# EAGLE board AK9750 Human Pres Panel (EAGLE 7.5.0)
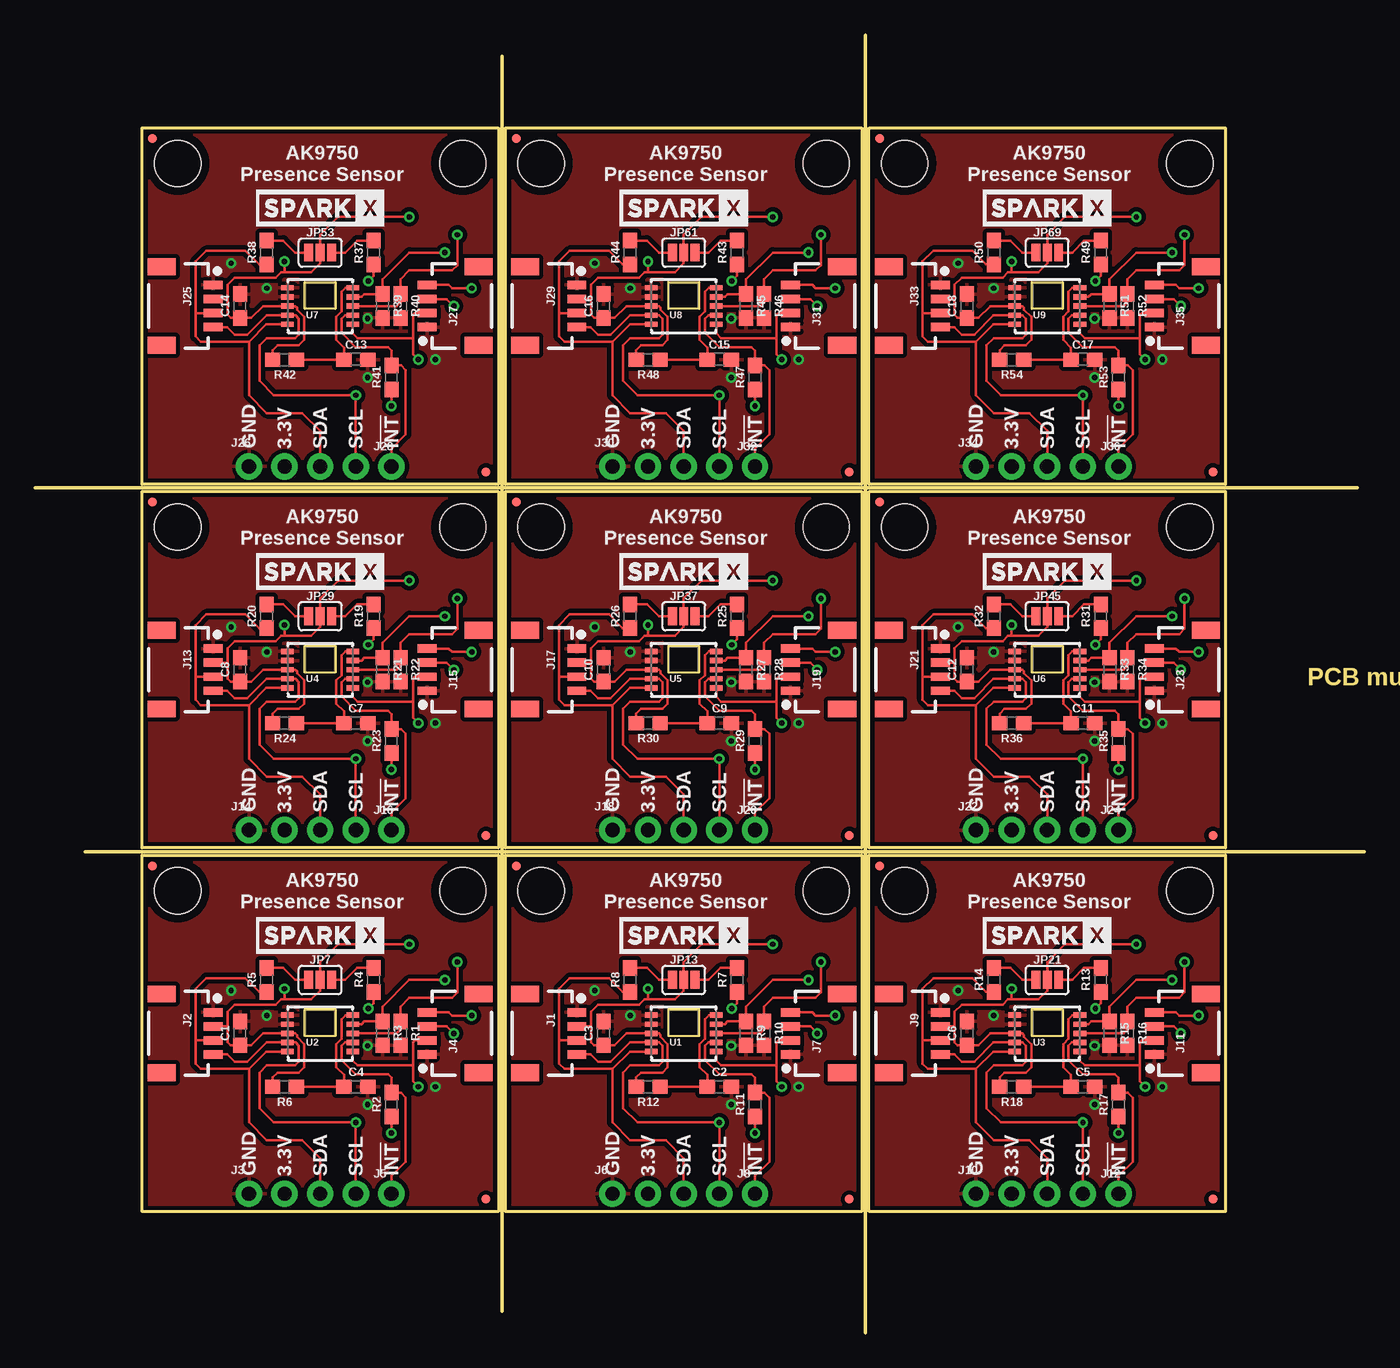
[diagram p0: board, top side]
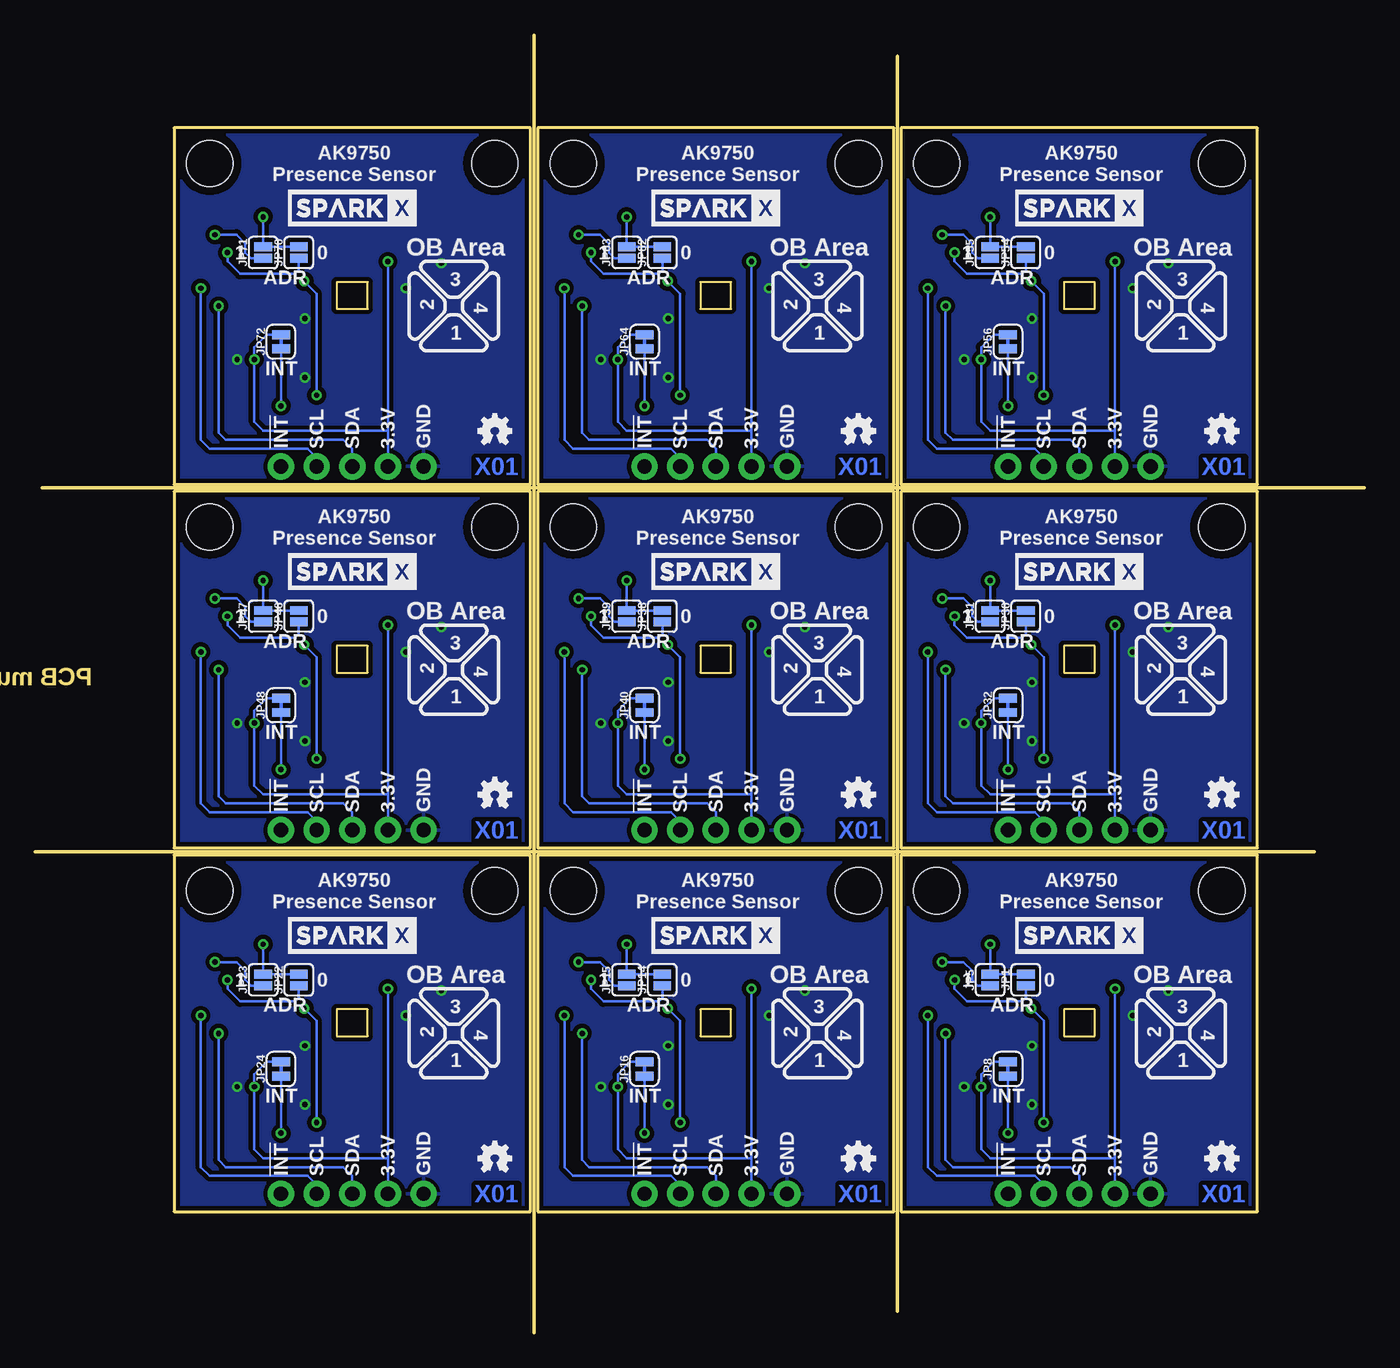
[diagram p1: board, bottom side, seen from below]

Size 94.74 x 92.46 mm. Coordinates in mm from the lower left corner, seen from the top.
Outline: 3.56,34.29 94.74,34.29
Outline: 0,60.2 94.23,60.2
Outline: 59.18,92.46 59.18,0
Outline: 33.27,1.52 33.27,90.93
Outline: 7.62,8.64 7.62,34.04 33.02,34.04 33.02,8.64 7.62,8.64
Outline: 33.53,8.64 33.53,34.04 58.93,34.04 58.93,8.64 33.53,8.64
Outline: 59.44,8.64 59.44,34.04 84.84,34.04 84.84,8.64 59.44,8.64
Outline: 7.62,34.54 7.62,59.94 33.02,59.94 33.02,34.54 7.62,34.54
Outline: 33.53,34.54 33.53,59.94 58.93,59.94 58.93,34.54 33.53,34.54
Outline: 59.44,34.54 59.44,59.94 84.84,59.94 84.84,34.54 59.44,34.54
Outline: 7.62,60.45 7.62,85.85 33.02,85.85 33.02,60.45 7.62,60.45
Outline: 33.53,60.45 33.53,85.85 58.93,85.85 58.93,60.45 33.53,60.45
Outline: 59.44,60.45 59.44,85.85 84.84,85.85 84.84,60.45 59.44,60.45
Copper layers (1*16): Top 0.035mm / dielectric 1.5mm / Bottom 0.035mm
Design rules "SparkFun-2-layer-TIGHT": minimum track width 7mil, minimum drill 15mil, track to track 7mil, track to pad 7mil, pad to pad 7mil, via to via 7mil, smd to smd 7mil, copper to edge 7mil, drill to drill 7mil, minimum pad ring 7mil, minimum via ring 7mil, stop-mask expansion 4mil, vias tented up to drill 25mil, thermal gap 10mil

## Footprints (pad centres in the part's own frame; a part is rotated, then mirrored left to right if it is on the bottom)
0603 = smd 1.1 x 1: 1 -0.85,0; 2 0.85,0
1X04_1MM_RA = smd 0.6 x 1.35: 1 -1.5,0; 2 -0.5,0; 3 0.5,0; 4 1.5,0 | smd 1.2 x 2: NC1 2.8,-3.675; NC2 -2.8,-3.675
1X04_NO_SILK = drill 1.016 pad 1.88: 1 0,0; 2 2.54,0; 3 5.08,0; 4 7.62,0
1X01NS_KIT = drill 1.016 pad 1.88: 1 0,0
SMT-JUMPER_2_NO_SILK = smd 0.635 x 1.27: 1 -0.406,0; 2 0.406,0
MICRO-FIDUCIAL = smd 0.635 x 0.635: 1 0,0
STAND-OFF = hole 3.302: 0,0
SMT-JUMPER_3_2-NC_PASTE_SILK = smd 0.635 x 1.27: 1 -0.813,0; 2 0,0; 3 0.813,0
SMT-JUMPER_2_NC_TRACE_SILK = smd 0.635 x 1.27: 1 -0.508,0; 2 0.508,0
SON10 = smd 0.9 x 0.38: 1 2.325,1.3; 2 2.325,0.65; 3 2.325,0; 4 2.325,-0.65; 5 2.325,-1.3; 6 -2.325,-1.3; 7 -2.325,-0.65; 8 -2.325,0; 9 -2.325,0.65; 10 -2.325,1.3

## Placement (x,y rotation side)
C1  1.0uF  [0603]  14.61,21.34 90 top
C2  1.0uF  [0603]  48.77,17.53 0 top
C3  1.0uF  [0603]  40.51,21.34 90 top
C4  1.0uF  [0603]  22.86,17.53 0 top
C5  1.0uF  [0603]  74.68,17.53 0 top
C6  1.0uF  [0603]  66.42,21.34 90 top
C7  1.0uF  [0603]  22.86,43.43 0 top
C8  1.0uF  [0603]  14.61,47.24 90 top
C9  1.0uF  [0603]  48.77,43.43 0 top
C10  1.0uF  [0603]  40.51,47.24 90 top
C11  1.0uF  [0603]  74.68,43.43 0 top
C12  1.0uF  [0603]  66.42,47.24 90 top
C13  1.0uF  [0603]  22.86,69.34 0 top
C14  1.0uF  [0603]  14.61,73.15 90 top
C15  1.0uF  [0603]  48.77,69.34 0 top
C16  1.0uF  [0603]  40.51,73.15 90 top
C17  1.0uF  [0603]  74.68,69.34 0 top
C18  1.0uF  [0603]  66.42,73.15 90 top
J1  SMD  [1X04_1MM_RA]  38.61,21.34 270 top
J2  SMD  [1X04_1MM_RA]  12.7,21.34 270 top
J3  PTH  [1X04_NO_SILK]  15.24,9.91 0 top
J4  SMD  [1X04_1MM_RA]  27.94,21.34 90 top
J5  [1X01NS_KIT]  25.4,9.91 0 top
J6  PTH  [1X04_NO_SILK]  41.15,9.91 0 top
J7  SMD  [1X04_1MM_RA]  53.85,21.34 90 top
J8  [1X01NS_KIT]  51.31,9.91 0 top
J9  SMD  [1X04_1MM_RA]  64.52,21.34 270 top
J10  PTH  [1X04_NO_SILK]  67.06,9.91 0 top
J11  SMD  [1X04_1MM_RA]  79.76,21.34 90 top
J12  [1X01NS_KIT]  77.22,9.91 0 top
J13  SMD  [1X04_1MM_RA]  12.7,47.24 270 top
J14  PTH  [1X04_NO_SILK]  15.24,35.81 0 top
J15  SMD  [1X04_1MM_RA]  27.94,47.24 90 top
J16  [1X01NS_KIT]  25.4,35.81 0 top
J17  SMD  [1X04_1MM_RA]  38.61,47.24 270 top
J18  PTH  [1X04_NO_SILK]  41.15,35.81 0 top
J19  SMD  [1X04_1MM_RA]  53.85,47.24 90 top
J20  [1X01NS_KIT]  51.31,35.81 0 top
J21  SMD  [1X04_1MM_RA]  64.52,47.24 270 top
J22  PTH  [1X04_NO_SILK]  67.06,35.81 0 top
J23  SMD  [1X04_1MM_RA]  79.76,47.24 90 top
J24  [1X01NS_KIT]  77.22,35.81 0 top
J25  SMD  [1X04_1MM_RA]  12.7,73.15 270 top
J26  PTH  [1X04_NO_SILK]  15.24,61.72 0 top
J27  SMD  [1X04_1MM_RA]  27.94,73.15 90 top
J28  [1X01NS_KIT]  25.4,61.72 0 top
J29  SMD  [1X04_1MM_RA]  38.61,73.15 270 top
J30  PTH  [1X04_NO_SILK]  41.15,61.72 0 top
J31  SMD  [1X04_1MM_RA]  53.85,73.15 90 top
J32  [1X01NS_KIT]  51.31,61.72 0 top
J33  SMD  [1X04_1MM_RA]  64.52,73.15 270 top
J34  PTH  [1X04_NO_SILK]  67.06,61.72 0 top
J35  SMD  [1X04_1MM_RA]  79.76,73.15 90 top
J36  [1X01NS_KIT]  77.22,61.72 0 top
JP1  [SMT-JUMPER_2_NO_SILK]  24.13,25.15 90 bottom
JP2  FIDUCIALUFIDUCIAL  [MICRO-FIDUCIAL]  32.13,9.52 0 top
JP3  STAND-OFF  [STAND-OFF]  10.16,31.5 0 top
JP4  STAND-OFF  [STAND-OFF]  30.48,31.5 0 top
JP5  [SMT-JUMPER_2_NO_SILK]  26.67,25.15 90 bottom
JP6  FIDUCIALUFIDUCIAL  [MICRO-FIDUCIAL]  8.38,33.27 0 top
JP7  [SMT-JUMPER_3_2-NC_PASTE_SILK]  20.32,25.15 0 top
JP8  [SMT-JUMPER_2_NC_TRACE_SILK]  25.4,18.8 90 bottom
JP9  STAND-OFF  [STAND-OFF]  36.07,31.5 0 top
JP10  STAND-OFF  [STAND-OFF]  56.39,31.5 0 top
JP11  FIDUCIALUFIDUCIAL  [MICRO-FIDUCIAL]  58.04,9.52 0 top
JP12  FIDUCIALUFIDUCIAL  [MICRO-FIDUCIAL]  34.29,33.27 0 top
JP13  [SMT-JUMPER_3_2-NC_PASTE_SILK]  46.23,25.15 0 top
JP14  [SMT-JUMPER_2_NO_SILK]  50.04,25.15 90 bottom
JP15  [SMT-JUMPER_2_NO_SILK]  52.58,25.15 90 bottom
JP16  [SMT-JUMPER_2_NC_TRACE_SILK]  51.31,18.8 90 bottom
JP17  STAND-OFF  [STAND-OFF]  61.98,31.5 0 top
JP18  STAND-OFF  [STAND-OFF]  82.3,31.5 0 top
JP19  FIDUCIALUFIDUCIAL  [MICRO-FIDUCIAL]  83.95,9.52 0 top
JP20  FIDUCIALUFIDUCIAL  [MICRO-FIDUCIAL]  60.2,33.27 0 top
JP21  [SMT-JUMPER_3_2-NC_PASTE_SILK]  72.14,25.15 0 top
JP22  [SMT-JUMPER_2_NO_SILK]  75.95,25.15 90 bottom
JP23  [SMT-JUMPER_2_NO_SILK]  78.49,25.15 90 bottom
JP24  [SMT-JUMPER_2_NC_TRACE_SILK]  77.22,18.8 90 bottom
JP25  STAND-OFF  [STAND-OFF]  10.16,57.4 0 top
JP26  STAND-OFF  [STAND-OFF]  30.48,57.4 0 top
JP27  FIDUCIALUFIDUCIAL  [MICRO-FIDUCIAL]  32.13,35.43 0 top
JP28  FIDUCIALUFIDUCIAL  [MICRO-FIDUCIAL]  8.38,59.18 0 top
JP29  [SMT-JUMPER_3_2-NC_PASTE_SILK]  20.32,51.05 0 top
JP30  [SMT-JUMPER_2_NO_SILK]  24.13,51.05 90 bottom
JP31  [SMT-JUMPER_2_NO_SILK]  26.67,51.05 90 bottom
JP32  [SMT-JUMPER_2_NC_TRACE_SILK]  25.4,44.7 90 bottom
JP33  STAND-OFF  [STAND-OFF]  36.07,57.4 0 top
JP34  STAND-OFF  [STAND-OFF]  56.39,57.4 0 top
JP35  FIDUCIALUFIDUCIAL  [MICRO-FIDUCIAL]  58.04,35.43 0 top
JP36  FIDUCIALUFIDUCIAL  [MICRO-FIDUCIAL]  34.29,59.18 0 top
JP37  [SMT-JUMPER_3_2-NC_PASTE_SILK]  46.23,51.05 0 top
JP38  [SMT-JUMPER_2_NO_SILK]  50.04,51.05 90 bottom
JP39  [SMT-JUMPER_2_NO_SILK]  52.58,51.05 90 bottom
JP40  [SMT-JUMPER_2_NC_TRACE_SILK]  51.31,44.7 90 bottom
JP41  STAND-OFF  [STAND-OFF]  61.98,57.4 0 top
JP42  STAND-OFF  [STAND-OFF]  82.3,57.4 0 top
JP43  FIDUCIALUFIDUCIAL  [MICRO-FIDUCIAL]  83.95,35.43 0 top
JP44  FIDUCIALUFIDUCIAL  [MICRO-FIDUCIAL]  60.2,59.18 0 top
JP45  [SMT-JUMPER_3_2-NC_PASTE_SILK]  72.14,51.05 0 top
JP46  [SMT-JUMPER_2_NO_SILK]  75.95,51.05 90 bottom
JP47  [SMT-JUMPER_2_NO_SILK]  78.49,51.05 90 bottom
JP48  [SMT-JUMPER_2_NC_TRACE_SILK]  77.22,44.7 90 bottom
JP49  STAND-OFF  [STAND-OFF]  10.16,83.31 0 top
JP50  STAND-OFF  [STAND-OFF]  30.48,83.31 0 top
JP51  FIDUCIALUFIDUCIAL  [MICRO-FIDUCIAL]  32.13,61.34 0 top
JP52  FIDUCIALUFIDUCIAL  [MICRO-FIDUCIAL]  8.38,85.09 0 top
JP53  [SMT-JUMPER_3_2-NC_PASTE_SILK]  20.32,76.96 0 top
JP54  [SMT-JUMPER_2_NO_SILK]  24.13,76.96 90 bottom
JP55  [SMT-JUMPER_2_NO_SILK]  26.67,76.96 90 bottom
JP56  [SMT-JUMPER_2_NC_TRACE_SILK]  25.4,70.61 90 bottom
JP57  STAND-OFF  [STAND-OFF]  36.07,83.31 0 top
JP58  STAND-OFF  [STAND-OFF]  56.39,83.31 0 top
JP59  FIDUCIALUFIDUCIAL  [MICRO-FIDUCIAL]  58.04,61.34 0 top
JP60  FIDUCIALUFIDUCIAL  [MICRO-FIDUCIAL]  34.29,85.09 0 top
JP61  [SMT-JUMPER_3_2-NC_PASTE_SILK]  46.23,76.96 0 top
JP62  [SMT-JUMPER_2_NO_SILK]  50.04,76.96 90 bottom
JP63  [SMT-JUMPER_2_NO_SILK]  52.58,76.96 90 bottom
JP64  [SMT-JUMPER_2_NC_TRACE_SILK]  51.31,70.61 90 bottom
JP65  STAND-OFF  [STAND-OFF]  61.98,83.31 0 top
JP66  STAND-OFF  [STAND-OFF]  82.3,83.31 0 top
JP67  FIDUCIALUFIDUCIAL  [MICRO-FIDUCIAL]  83.95,61.34 0 top
JP68  FIDUCIALUFIDUCIAL  [MICRO-FIDUCIAL]  60.2,85.09 0 top
JP69  [SMT-JUMPER_3_2-NC_PASTE_SILK]  72.14,76.96 0 top
JP70  [SMT-JUMPER_2_NO_SILK]  75.95,76.96 90 bottom
JP71  [SMT-JUMPER_2_NO_SILK]  78.49,76.96 90 bottom
JP72  [SMT-JUMPER_2_NC_TRACE_SILK]  77.22,70.61 90 bottom
LOGO1  OSHW-LOGOMINI  [OSHW-LOGO-MINI]  10.16,12.45 0 bottom
LOGO2  OSHW-LOGOMINI  [OSHW-LOGO-MINI]  36.07,12.45 0 bottom
LOGO3  OSHW-LOGOMINI  [OSHW-LOGO-MINI]  61.98,12.45 0 bottom
LOGO4  OSHW-LOGOMINI  [OSHW-LOGO-MINI]  10.16,38.35 0 bottom
LOGO5  OSHW-LOGOMINI  [OSHW-LOGO-MINI]  36.07,38.35 0 bottom
LOGO6  OSHW-LOGOMINI  [OSHW-LOGO-MINI]  61.98,38.35 0 bottom
LOGO7  OSHW-LOGOMINI  [OSHW-LOGO-MINI]  10.16,64.26 0 bottom
LOGO8  OSHW-LOGOMINI  [OSHW-LOGO-MINI]  36.07,64.26 0 bottom
LOGO9  OSHW-LOGOMINI  [OSHW-LOGO-MINI]  61.98,64.26 0 bottom
R1  10k  [0603]  26.04,21.34 270 top
R2  10k  [0603]  25.4,16.26 90 top
R3  10k  [0603]  24.77,21.34 270 top
R4  4.7k  [0603]  24.13,25.15 90 top
R5  4.7k  [0603]  16.51,25.15 90 top
R6  330  [0603]  17.78,17.53 180 top
R7  4.7k  [0603]  50.04,25.15 90 top
R8  4.7k  [0603]  42.42,25.15 90 top
R9  10k  [0603]  50.67,21.34 270 top
R10  10k  [0603]  51.94,21.34 270 top
R11  10k  [0603]  51.31,16.26 90 top
R12  330  [0603]  43.69,17.53 180 top
R13  4.7k  [0603]  75.95,25.15 90 top
R14  4.7k  [0603]  68.33,25.15 90 top
R15  10k  [0603]  76.58,21.34 270 top
R16  10k  [0603]  77.85,21.34 270 top
R17  10k  [0603]  77.22,16.26 90 top
R18  330  [0603]  69.6,17.53 180 top
R19  4.7k  [0603]  24.13,51.05 90 top
R20  4.7k  [0603]  16.51,51.05 90 top
R21  10k  [0603]  24.77,47.24 270 top
R22  10k  [0603]  26.04,47.24 270 top
R23  10k  [0603]  25.4,42.16 90 top
R24  330  [0603]  17.78,43.43 180 top
R25  4.7k  [0603]  50.04,51.05 90 top
R26  4.7k  [0603]  42.42,51.05 90 top
R27  10k  [0603]  50.67,47.24 270 top
R28  10k  [0603]  51.94,47.24 270 top
R29  10k  [0603]  51.31,42.16 90 top
R30  330  [0603]  43.69,43.43 180 top
R31  4.7k  [0603]  75.95,51.05 90 top
R32  4.7k  [0603]  68.33,51.05 90 top
R33  10k  [0603]  76.58,47.24 270 top
R34  10k  [0603]  77.85,47.24 270 top
R35  10k  [0603]  77.22,42.16 90 top
R36  330  [0603]  69.6,43.43 180 top
R37  4.7k  [0603]  24.13,76.96 90 top
R38  4.7k  [0603]  16.51,76.96 90 top
R39  10k  [0603]  24.77,73.15 270 top
R40  10k  [0603]  26.04,73.15 270 top
R41  10k  [0603]  25.4,68.07 90 top
R42  330  [0603]  17.78,69.34 180 top
R43  4.7k  [0603]  50.04,76.96 90 top
R44  4.7k  [0603]  42.42,76.96 90 top
R45  10k  [0603]  50.67,73.15 270 top
R46  10k  [0603]  51.94,73.15 270 top
R47  10k  [0603]  51.31,68.07 90 top
R48  330  [0603]  43.69,69.34 180 top
R49  4.7k  [0603]  75.95,76.96 90 top
R50  4.7k  [0603]  68.33,76.96 90 top
R51  10k  [0603]  76.58,73.15 270 top
R52  10k  [0603]  77.85,73.15 270 top
R53  10k  [0603]  77.22,68.07 90 top
R54  330  [0603]  69.6,69.34 180 top
U1  AK9750  [SON10]  46.23,21.34 0 top
U2  AK9750  [SON10]  20.32,21.34 0 top
U3  AK9750  [SON10]  72.14,21.34 0 top
U4  AK9750  [SON10]  20.32,47.24 0 top
U5  AK9750  [SON10]  46.23,47.24 0 top
U6  AK9750  [SON10]  72.14,47.24 0 top
U7  AK9750  [SON10]  20.32,73.15 0 top
U8  AK9750  [SON10]  46.23,73.15 0 top
U9  AK9750  [SON10]  72.14,73.15 0 top
U$1  SPARKX-LOGO4  [SPARKX-MEDIUM]  20.32,28.32 0 bottom
U$2  SPARKX-LOGO4  [SPARKX-MEDIUM]  20.32,28.32 0 top
U$3  SPARKX-LOGO4  [SPARKX-MEDIUM]  46.23,28.32 0 top
U$4  SPARKX-LOGO4  [SPARKX-MEDIUM]  46.23,28.32 0 bottom
U$5  SPARKX-LOGO4  [SPARKX-MEDIUM]  72.14,28.32 0 top
U$6  SPARKX-LOGO4  [SPARKX-MEDIUM]  72.14,28.32 0 bottom
U$7  SPARKX-LOGO4  [SPARKX-MEDIUM]  20.32,54.23 0 top
U$8  SPARKX-LOGO4  [SPARKX-MEDIUM]  20.32,54.23 0 bottom
U$9  SPARKX-LOGO4  [SPARKX-MEDIUM]  46.23,54.23 0 top
U$10  SPARKX-LOGO4  [SPARKX-MEDIUM]  46.23,54.23 0 bottom
U$11  SPARKX-LOGO4  [SPARKX-MEDIUM]  72.14,54.23 0 top
U$12  SPARKX-LOGO4  [SPARKX-MEDIUM]  72.14,54.23 0 bottom
U$13  SPARKX-LOGO4  [SPARKX-MEDIUM]  20.32,80.14 0 top
U$14  SPARKX-LOGO4  [SPARKX-MEDIUM]  20.32,80.14 0 bottom
U$15  SPARKX-LOGO4  [SPARKX-MEDIUM]  46.23,80.14 0 top
U$16  SPARKX-LOGO4  [SPARKX-MEDIUM]  46.23,80.14 0 bottom
U$17  SPARKX-LOGO4  [SPARKX-MEDIUM]  72.14,80.14 0 top
U$18  SPARKX-LOGO4  [SPARKX-MEDIUM]  72.14,80.14 0 bottom

## Library data of the parts
C1-C18 = SparkFun-Capacitors; PROD_ID: CAP-00868
J1-J4 J6 J7 J9-J11 J13-J15 J17-J19 J21-J23 J25-J27 J29-J31 J33-J35 U1-U9 U$1-U$18 = SparkX
J5 J8 J12 J16 J20 J24 J28 J32 J36 = SparkFun-Connectors
JP1 JP5 JP7 JP8 JP13-JP16 JP21-JP24 JP29-JP32 JP37-JP40 JP45-JP48 JP53-JP56 JP61-JP64 JP69-JP72 = SparkFun-Jumpers
JP2-JP4 JP6 JP9-JP12 JP17-JP20 JP25-JP28 JP33-JP36 JP41-JP44 JP49-JP52 JP57-JP60 JP65-JP68 = SparkFun
LOGO1-LOGO9 = SparkFun-Aesthetics
R1-R3 R9-R11 R15-R17 R21-R23 R27-R29 R33-R35 R39-R41 R45-R47 R51-R53 = SparkFun-Resistors; PROD_ID: RES-00824
R4 R5 R7 R8 R13 R14 R19 R20 R25 R26 R31 R32 R37 R38 R43 R44 R49 R50 = SparkFun-Resistors; PROD_ID: RES-07857
R6 R12 R18 R24 R30 R36 R42 R48 R54 = SparkFun-Resistors; PROD_ID: RES-00818

## Nets
3.3V: C1.1 J2.2 J3.2 J4.2 JP1.2 JP5.2 JP7.2 JP8.2 R6.2 U2.5 U2.8
3.3V1: C3.1 J1.2 J6.2 J7.2 JP13.2 JP14.2 JP15.2 JP16.2 R12.2 U1.5 U1.8
3.3V2: C6.1 J9.2 J10.2 J11.2 JP21.2 JP22.2 JP23.2 JP24.2 R18.2 U3.5 U3.8
3.3V3: C8.1 J13.2 J14.2 J15.2 JP29.2 JP30.2 JP31.2 JP32.2 R24.2 U4.5 U4.8
3.3V4: C10.1 J17.2 J18.2 J19.2 JP37.2 JP38.2 JP39.2 JP40.2 R30.2 U5.5 U5.8
3.3V5: C12.1 J21.2 J22.2 J23.2 JP45.2 JP46.2 JP47.2 JP48.2 R36.2 U6.5 U6.8
3.3V6: C14.1 J25.2 J26.2 J27.2 JP53.2 JP54.2 JP55.2 JP56.2 R42.2 U7.5 U7.8
3.3V7: C16.1 J29.2 J30.2 J31.2 JP61.2 JP62.2 JP63.2 JP64.2 R48.2 U8.5 U8.8
3.3V8: C18.1 J33.2 J34.2 J35.2 JP69.2 JP70.2 JP71.2 JP72.2 R54.2 U9.5 U9.8
!INT: J5.1 R2.2 U2.4
!INT1: J8.1 R11.2 U1.4
!INT2: J12.1 R17.2 U3.4
!INT3: J16.1 R23.2 U4.4
!INT4: J20.1 R29.2 U5.4
!INT5: J24.1 R35.2 U6.4
!INT6: J28.1 R41.2 U7.4
!INT7: J32.1 R47.2 U8.4
!INT8: J36.1 R53.2 U9.4
ADR0: JP1.1 R3.1 U2.2
ADR1: JP5.1 R1.1 U2.3
ADR2: JP14.1 R9.1 U1.2
ADR3: JP15.1 R10.1 U1.3
ADR4: JP22.1 R15.1 U3.2
ADR5: JP23.1 R16.1 U3.3
ADR6: JP30.1 R21.1 U4.2
ADR7: JP31.1 R22.1 U4.3
ADR8: JP38.1 R27.1 U5.2
ADR9: JP39.1 R28.1 U5.3
ADR10: JP46.1 R33.1 U6.2
ADR11: JP47.1 R34.1 U6.3
ADR12: JP54.1 R39.1 U7.2
ADR13: JP55.1 R40.1 U7.3
ADR14: JP62.1 R45.1 U8.2
ADR15: JP63.1 R46.1 U8.3
ADR16: JP70.1 R51.1 U9.2
ADR17: JP71.1 R52.1 U9.3
GND: C1.2 C4.2 J2.1 J3.1 J4.1 R1.2 R3.2 U2.9 U2.10
GND1: C2.2 C3.2 J1.1 J6.1 J7.1 R9.2 R10.2 U1.9 U1.10
GND2: C5.2 C6.2 J9.1 J10.1 J11.1 R15.2 R16.2 U3.9 U3.10
GND3: C7.2 C8.2 J13.1 J14.1 J15.1 R21.2 R22.2 U4.9 U4.10
GND4: C9.2 C10.2 J17.1 J18.1 J19.1 R27.2 R28.2 U5.9 U5.10
GND5: C11.2 C12.2 J21.1 J22.1 J23.1 R33.2 R34.2 U6.9 U6.10
GND6: C13.2 C14.2 J25.1 J26.1 J27.1 R39.2 R40.2 U7.9 U7.10
GND7: C15.2 C16.2 J29.1 J30.1 J31.1 R45.2 R46.2 U8.9 U8.10
GND8: C17.2 C18.2 J33.1 J34.1 J35.1 R51.2 R52.2 U9.9 U9.10
N$1: JP7.1 R5.2
N$2: JP7.3 R4.2
N$3: JP8.1 R2.1
N$4: C4.1 R6.1 U2.1
N$5: JP13.1 R8.2
N$6: JP13.3 R7.2
N$7: JP16.1 R11.1
N$8: C2.1 R12.1 U1.1
N$9: JP21.1 R14.2
N$10: JP21.3 R13.2
N$11: JP24.1 R17.1
N$12: C5.1 R18.1 U3.1
N$13: JP29.1 R20.2
N$14: JP29.3 R19.2
N$15: JP32.1 R23.1
N$16: C7.1 R24.1 U4.1
N$17: JP37.1 R26.2
N$18: JP37.3 R25.2
N$19: JP40.1 R29.1
N$20: C9.1 R30.1 U5.1
N$21: JP45.1 R32.2
N$22: JP45.3 R31.2
N$23: JP48.1 R35.1
N$24: C11.1 R36.1 U6.1
N$25: JP53.1 R38.2
N$26: JP53.3 R37.2
N$27: JP56.1 R41.1
N$28: C13.1 R42.1 U7.1
N$29: JP61.1 R44.2
N$30: JP61.3 R43.2
N$31: JP64.1 R47.1
N$32: C15.1 R48.1 U8.1
N$33: JP69.1 R50.2
N$34: JP69.3 R49.2
N$35: JP72.1 R53.1
N$36: C17.1 R54.1 U9.1
SCL: J2.4 J3.4 J4.4 R4.1 U2.7
SCL1: J1.4 J6.4 J7.4 R7.1 U1.7
SCL2: J9.4 J10.4 J11.4 R13.1 U3.7
SCL3: J13.4 J14.4 J15.4 R19.1 U4.7
SCL4: J17.4 J18.4 J19.4 R25.1 U5.7
SCL5: J21.4 J22.4 J23.4 R31.1 U6.7
SCL6: J25.4 J26.4 J27.4 R37.1 U7.7
SCL7: J29.4 J30.4 J31.4 R43.1 U8.7
SCL8: J33.4 J34.4 J35.4 R49.1 U9.7
SDA: J2.3 J3.3 J4.3 R5.1 U2.6
SDA1: J1.3 J6.3 J7.3 R8.1 U1.6
SDA2: J9.3 J10.3 J11.3 R14.1 U3.6
SDA3: J13.3 J14.3 J15.3 R20.1 U4.6
SDA4: J17.3 J18.3 J19.3 R26.1 U5.6
SDA5: J21.3 J22.3 J23.3 R32.1 U6.6
SDA6: J25.3 J26.3 J27.3 R38.1 U7.6
SDA7: J29.3 J30.3 J31.3 R44.1 U8.6
SDA8: J33.3 J34.3 J35.3 R50.1 U9.6

## Tracks (layer width: path | path; a pad name or v marks a point on that pad's centre or on a via)
3.3V  (via drill 0.38)
  Top 0.178: U2.5 22.64,19.39 22.99,19.05 26.92,19.05 | 17.78,23.75 17.53,23.75 17.14,23.37 14.22,23.37 13.72,22.86 13.72,21.84 | J2.2 13.71,21.84 13.72,21.84 | v26.67,27.69 21.59,27.69 20.32,26.42 JP7.2 20.32,24.38 19.68,23.75 17.78,23.75 | v17.78,24.51 17.78,23.75 | 13.72,21.84 13.72,20.7 13.93,20.49 C1.1 15.41,20.49 16.26,21.34 U2.8 18.54,21.34 18.67,21.21 18.67,21.08 19.18,20.57 19.18,18.92 18.8,18.54 17.27,18.54 16.93,18.2 R6.2 | 26.92,19.05 26.92,17.91 v27.3,17.53 | J4.2 27.06,20.84 26.92,20.7 26.92,19.05
  Bottom 0.178: JP1.2 JP5.2 v26.67,27.69 | J3.2 17.78,12.45 | 17.78,12.45 v17.78,24.51 | 17.78,12.45 26.67,12.45 27.3,13.08 v27.3,17.53 27.3,18.41 26.42,19.3 JP8.2
3.3V1  (via drill 0.38)
  Top 0.178: U1.5 48.55,19.39 48.89,19.05 52.83,19.05 | 43.69,23.75 43.43,23.75 43.05,23.37 40.13,23.37 39.62,22.86 39.62,21.84 | J1.2 39.62,21.84 | v52.58,27.69 47.5,27.69 46.23,26.42 JP13.2 46.23,24.38 45.59,23.75 43.69,23.75 | v43.69,24.51 43.69,23.75 | 39.62,21.84 39.62,20.7 39.84,20.49 C3.1 41.31,20.49 42.16,21.34 U1.8 44.45,21.34 44.58,21.21 44.58,21.08 45.09,20.57 45.09,18.92 44.7,18.54 43.18,18.54 42.84,18.2 R12.2 | 52.83,19.05 52.83,17.91 v53.21,17.53 | J7.2 52.97,20.84 52.83,20.7 52.83,19.05
  Bottom 0.178: JP14.2 JP15.2 v52.58,27.69 | J6.2 43.69,12.45 | 43.69,12.45 v43.69,24.51 | 43.69,12.45 52.58,12.45 53.21,13.08 v53.21,17.53 53.21,18.41 52.32,19.3 JP16.2
3.3V2  (via drill 0.38)
  Top 0.178: U3.5 74.46,19.39 74.8,19.05 78.74,19.05 | 69.6,23.75 69.34,23.75 68.96,23.37 66.04,23.37 65.53,22.86 65.53,21.84 | J9.2 65.52,21.84 65.53,21.84 | v78.49,27.69 73.41,27.69 72.14,26.42 JP21.2 72.14,24.38 71.5,23.75 69.6,23.75 | v69.6,24.51 69.6,23.75 | 65.53,21.84 65.53,20.7 65.75,20.49 C6.1 67.22,20.49 68.07,21.34 U3.8 70.36,21.34 70.48,21.21 70.48,21.08 70.99,20.57 70.99,18.92 70.61,18.54 69.09,18.54 68.75,18.2 R18.2 | 78.74,19.05 78.74,17.91 v79.12,17.53 | J11.2 78.88,20.84 78.74,20.7 78.74,19.05
  Bottom 0.178: JP22.2 JP23.2 v78.49,27.69 | J10.2 69.6,12.45 | 69.6,12.45 v69.6,24.51 | 69.6,12.45 78.49,12.45 79.12,13.08 v79.12,17.53 79.12,18.41 78.23,19.3 JP24.2
3.3V3  (via drill 0.38)
  Top 0.178: U4.5 22.64,45.3 22.99,44.96 26.92,44.96 | 17.78,49.66 17.53,49.66 17.14,49.28 14.22,49.28 13.72,48.77 13.72,47.75 | J13.2 13.71,47.74 13.72,47.75 | v26.67,53.59 21.59,53.59 20.32,52.32 JP29.2 20.32,50.29 19.68,49.66 17.78,49.66 | v17.78,50.42 17.78,49.66 | 13.72,47.75 13.72,46.61 13.93,46.39 C8.1 15.41,46.39 16.26,47.24 U4.8 18.54,47.24 18.67,47.12 18.67,46.99 19.18,46.48 19.18,44.83 18.8,44.45 17.27,44.45 16.93,44.11 R24.2 | 26.92,44.96 26.92,43.81 v27.3,43.43 | J15.2 27.06,46.74 26.92,46.61 26.92,44.96
  Bottom 0.178: JP30.2 JP31.2 v26.67,53.59 | J14.2 17.78,38.35 | 17.78,38.35 v17.78,50.42 | 17.78,38.35 26.67,38.35 27.3,38.99 v27.3,43.43 27.3,44.32 26.42,45.21 JP32.2
3.3V4  (via drill 0.38)
  Top 0.178: U5.5 48.55,45.3 48.89,44.96 52.83,44.96 | 43.69,49.66 43.43,49.66 43.05,49.28 40.13,49.28 39.62,48.77 39.62,47.75 | J17.2 39.62,47.74 39.62,47.75 | v52.58,53.59 47.5,53.59 46.23,52.32 JP37.2 46.23,50.29 45.59,49.66 43.69,49.66 | v43.69,50.42 43.69,49.66 | 39.62,47.75 39.62,46.61 39.84,46.39 C10.1 41.31,46.39 42.16,47.24 U5.8 44.45,47.24 44.58,47.12 44.58,46.99 45.09,46.48 45.09,44.83 44.7,44.45 43.18,44.45 42.84,44.11 R30.2 | 52.83,44.96 52.83,43.81 v53.21,43.43 | J19.2 52.97,46.74 52.83,46.61 52.83,44.96
  Bottom 0.178: JP38.2 JP39.2 v52.58,53.59 | J18.2 43.69,38.35 | 43.69,38.35 v43.69,50.42 | 43.69,38.35 52.58,38.35 53.21,38.99 v53.21,43.43 53.21,44.32 52.32,45.21 JP40.2
3.3V5  (via drill 0.38)
  Top 0.178: U6.5 74.46,45.3 74.8,44.96 78.74,44.96 | 69.6,49.66 69.34,49.66 68.96,49.28 66.04,49.28 65.53,48.77 65.53,47.75 | J21.2 65.52,47.74 65.53,47.75 | v78.49,53.59 73.41,53.59 72.14,52.32 JP45.2 72.14,50.29 71.5,49.66 69.6,49.66 | v69.6,50.42 69.6,49.66 | 65.53,47.75 65.53,46.61 65.75,46.39 C12.1 67.22,46.39 68.07,47.24 U6.8 70.36,47.24 70.48,47.12 70.48,46.99 70.99,46.48 70.99,44.83 70.61,44.45 69.09,44.45 68.75,44.11 R36.2 | 78.74,44.96 78.74,43.81 v79.12,43.43 | J23.2 78.88,46.74 78.74,46.61 78.74,44.96
  Bottom 0.178: JP46.2 JP47.2 v78.49,53.59 | J22.2 69.6,38.35 | 69.6,38.35 v69.6,50.42 | 69.6,38.35 78.49,38.35 79.12,38.99 v79.12,43.43 79.12,44.32 78.23,45.21 JP48.2
3.3V6  (via drill 0.38)
  Top 0.178: U7.5 22.64,71.21 22.99,70.87 26.92,70.87 | 17.78,75.56 17.53,75.56 17.14,75.18 14.22,75.18 13.72,74.68 13.72,73.66 | J25.2 13.71,73.65 13.72,73.66 | v26.67,79.5 21.59,79.5 20.32,78.23 JP53.2 20.32,76.2 19.68,75.56 17.78,75.56 | v17.78,76.33 17.78,75.56 | 13.72,73.66 13.72,72.52 13.93,72.3 C14.1 15.41,72.3 16.26,73.15 U7.8 18.54,73.15 18.67,73.02 18.67,72.9 19.18,72.39 19.18,70.74 18.8,70.36 17.27,70.36 16.93,70.02 R42.2 | 26.92,70.87 26.92,69.72 v27.3,69.34 | J27.2 27.06,72.65 26.92,72.52 26.92,70.87
  Bottom 0.178: JP54.2 JP55.2 v26.67,79.5 | J26.2 17.78,64.26 | 17.78,64.26 v17.78,76.33 | 17.78,64.26 26.67,64.26 27.3,64.9 v27.3,69.34 27.3,70.23 26.42,71.12 JP56.2
3.3V7  (via drill 0.38)
  Top 0.178: U8.5 48.55,71.21 48.89,70.87 52.83,70.87 | 43.69,75.56 43.43,75.56 43.05,75.18 40.13,75.18 39.62,74.68 39.62,73.66 | J29.2 39.62,73.65 39.62,73.66 | v52.58,79.5 47.5,79.5 46.23,78.23 JP61.2 46.23,76.2 45.59,75.56 43.69,75.56 | v43.69,76.33 43.69,75.56 | 39.62,73.66 39.62,72.52 39.84,72.3 C16.1 41.31,72.3 42.16,73.15 U8.8 44.45,73.15 44.58,73.02 44.58,72.9 45.09,72.39 45.09,70.74 44.7,70.36 43.18,70.36 42.84,70.02 R48.2 | 52.83,70.87 52.83,69.72 v53.21,69.34 | J31.2 52.97,72.65 52.83,72.52 52.83,70.87
  Bottom 0.178: JP62.2 JP63.2 v52.58,79.5 | J30.2 43.69,64.26 | 43.69,64.26 v43.69,76.33 | 43.69,64.26 52.58,64.26 53.21,64.9 v53.21,69.34 53.21,70.23 52.32,71.12 JP64.2
3.3V8  (via drill 0.38)
  Top 0.178: U9.5 74.46,71.21 74.8,70.87 78.74,70.87 | 69.6,75.56 69.34,75.56 68.96,75.18 66.04,75.18 65.53,74.68 65.53,73.66 | J33.2 65.52,73.65 65.53,73.66 | v78.49,79.5 73.41,79.5 72.14,78.23 JP69.2 72.14,76.2 71.5,75.56 69.6,75.56 | v69.6,76.33 69.6,75.56 | 65.53,73.66 65.53,72.52 65.75,72.3 C18.1 67.22,72.3 68.07,73.15 U9.8 70.36,73.15 70.48,73.02 70.48,72.9 70.99,72.39 70.99,70.74 70.61,70.36 69.09,70.36 68.75,70.02 R54.2 | 78.74,70.87 78.74,69.72 v79.12,69.34 | J35.2 78.88,72.65 78.74,72.52 78.74,70.87
  Bottom 0.178: JP70.2 JP71.2 v78.49,79.5 | J34.2 69.6,64.26 | 69.6,64.26 v69.6,76.33 | 69.6,64.26 78.49,64.26 79.12,64.9 v79.12,69.34 79.12,70.23 78.23,71.12 JP72.2
!INT
  Top 0.178: U2.4 22.08,20.69 21.84,20.45 21.84,19.43 22.86,18.41 25.15,18.41 25.4,18.16 R2.2 26.07,17.11 26.42,16.76 26.42,12.19 25.4,11.18 J5.1
!INT1
  Top 0.178: U1.4 47.99,20.69 47.75,20.45 47.75,19.43 48.77,18.41 51.05,18.41 51.31,18.16 R11.2 51.98,17.11 52.32,16.76 52.32,12.19 51.31,11.18 J8.1
!INT2
  Top 0.178: U3.4 73.9,20.69 73.66,20.45 73.66,19.43 74.68,18.41 76.96,18.41 77.22,18.16 R17.2 77.89,17.11 78.23,16.76 78.23,12.19 77.22,11.18 J12.1
!INT3
  Top 0.178: U4.4 22.08,46.59 21.84,46.36 21.84,45.34 22.86,44.32 25.15,44.32 25.4,44.07 R23.2 26.07,43.01 26.42,42.67 26.42,38.1 25.4,37.08 J16.1
!INT4
  Top 0.178: U5.4 47.99,46.59 47.75,46.36 47.75,45.34 48.77,44.32 51.05,44.32 51.31,44.07 R29.2 51.98,43.01 52.32,42.67 52.32,38.1 51.31,37.08 J20.1
!INT5
  Top 0.178: U6.4 73.9,46.59 73.66,46.36 73.66,45.34 74.68,44.32 76.96,44.32 77.22,44.07 R35.2 77.89,43.01 78.23,42.67 78.23,38.1 77.22,37.08 J24.1
!INT6
  Top 0.178: U7.4 22.08,72.5 21.84,72.26 21.84,71.25 22.86,70.23 25.15,70.23 25.4,69.98 R41.2 26.07,68.92 26.42,68.58 26.42,64.01 25.4,62.99 J28.1
!INT7
  Top 0.178: U8.4 47.99,72.5 47.75,72.26 47.75,71.25 48.77,70.23 51.05,70.23 51.31,69.98 R47.2 51.98,68.92 52.32,68.58 52.32,64.01 51.31,62.99 J32.1
!INT8
  Top 0.178: U9.4 73.9,72.5 73.66,72.26 73.66,71.25 74.68,70.23 76.96,70.23 77.22,69.98 R53.2 77.89,68.92 78.23,68.58 78.23,64.01 77.22,62.99 J36.1
ADR0  (via drill 0.38)
  Top 0.178: U2.2 23.26,21.99 23.46,22.19 R3.1 24.77,23.24 26.67,25.15 v29.21,25.15
  Bottom 0.178: JP1.1 24.13,23.88 24.38,23.62 28.32,23.62 29.21,24.51 v29.21,25.15
ADR1  (via drill 0.38)
  Top 0.178: U2.3 25.78,21.34 26.04,21.59 R1.1 26.04,23.24 26.67,23.88 29.72,23.88 30.1,24.26 v30.1,26.42
  Bottom 0.178: JP5.1 27.53,24.74 27.94,25.15 27.94,25.78 28.57,26.42 v30.1,26.42
ADR2  (via drill 0.38)
  Top 0.178: U1.2 49.16,21.99 49.36,22.19 R9.1 50.67,23.24 52.58,25.15 v55.12,25.15
  Bottom 0.178: JP14.1 50.04,23.88 50.29,23.62 54.23,23.62 55.12,24.51 v55.12,25.15
ADR3  (via drill 0.38)
  Top 0.178: U1.3 51.69,21.34 51.94,21.59 R10.1 51.94,23.24 52.58,23.88 55.63,23.88 56.01,24.26 v56.01,26.42
  Bottom 0.178: JP15.1 53.44,24.74 53.85,25.15 53.85,25.78 54.48,26.42 v56.01,26.42
ADR4  (via drill 0.38)
  Top 0.178: U3.2 75.07,21.99 75.27,22.19 R15.1 76.58,23.24 78.49,25.15 v81.03,25.15
  Bottom 0.178: JP22.1 75.95,23.88 76.2,23.62 80.14,23.62 81.03,24.51 v81.03,25.15
ADR5  (via drill 0.38)
  Top 0.178: U3.3 77.6,21.34 77.85,21.59 R16.1 77.85,23.24 78.49,23.88 81.53,23.88 81.92,24.26 v81.92,26.42
  Bottom 0.178: JP23.1 79.35,24.74 79.76,25.15 79.76,25.78 80.39,26.42 v81.92,26.42
ADR6  (via drill 0.38)
  Top 0.178: U4.2 23.26,47.89 23.46,48.09 R21.1 24.77,49.15 26.67,51.05 v29.21,51.05
  Bottom 0.178: JP30.1 24.13,49.78 24.38,49.53 28.32,49.53 29.21,50.42 v29.21,51.05
ADR7  (via drill 0.38)
  Top 0.178: U4.3 25.78,47.24 26.04,47.5 R22.1 26.04,49.15 26.67,49.78 29.72,49.78 30.1,50.17 v30.1,52.32
  Bottom 0.178: JP31.1 27.53,50.65 27.94,51.05 27.94,51.69 28.57,52.32 v30.1,52.32
ADR8  (via drill 0.38)
  Top 0.178: U5.2 49.16,47.89 49.36,48.09 R27.1 50.67,49.15 52.58,51.05 v55.12,51.05
  Bottom 0.178: JP38.1 50.04,49.78 50.29,49.53 54.23,49.53 55.12,50.42 v55.12,51.05
ADR9  (via drill 0.38)
  Top 0.178: U5.3 51.69,47.24 51.94,47.5 R28.1 51.94,49.15 52.58,49.78 55.63,49.78 56.01,50.17 v56.01,52.32
  Bottom 0.178: JP39.1 53.44,50.65 53.85,51.05 53.85,51.69 54.48,52.32 v56.01,52.32
ADR10  (via drill 0.38)
  Top 0.178: U6.2 75.07,47.89 75.27,48.09 R33.1 76.58,49.15 78.49,51.05 v81.03,51.05
  Bottom 0.178: JP46.1 75.95,49.78 76.2,49.53 80.14,49.53 81.03,50.42 v81.03,51.05
ADR11  (via drill 0.38)
  Top 0.178: U6.3 77.6,47.24 77.85,47.5 R34.1 77.85,49.15 78.49,49.78 81.53,49.78 81.92,50.17 v81.92,52.32
  Bottom 0.178: JP47.1 79.35,50.65 79.76,51.05 79.76,51.69 80.39,52.32 v81.92,52.32
ADR12  (via drill 0.38)
  Top 0.178: U7.2 23.26,73.8 23.46,74 R39.1 24.77,75.06 26.67,76.96 v29.21,76.96
  Bottom 0.178: JP54.1 24.13,75.69 24.38,75.44 28.32,75.44 29.21,76.33 v29.21,76.96
ADR13  (via drill 0.38)
  Top 0.178: U7.3 25.78,73.15 26.04,73.41 R40.1 26.04,75.06 26.67,75.69 29.72,75.69 30.1,76.07 v30.1,78.23
  Bottom 0.178: JP55.1 27.53,76.56 27.94,76.96 27.94,77.6 28.57,78.23 v30.1,78.23
ADR14  (via drill 0.38)
  Top 0.178: U8.2 49.16,73.8 49.36,74 R45.1 50.67,75.06 52.58,76.96 v55.12,76.96
  Bottom 0.178: JP62.1 50.04,75.69 50.29,75.44 54.23,75.44 55.12,76.33 v55.12,76.96
ADR15  (via drill 0.38)
  Top 0.178: U8.3 51.69,73.15 51.94,73.41 R46.1 51.94,75.06 52.58,75.69 55.63,75.69 56.01,76.07 v56.01,78.23
  Bottom 0.178: JP63.1 53.44,76.56 53.85,76.96 53.85,77.6 54.48,78.23 v56.01,78.23
ADR16  (via drill 0.38)
  Top 0.178: U9.2 75.07,73.8 75.27,74 R51.1 76.58,75.06 78.49,76.96 v81.03,76.96
  Bottom 0.178: JP70.1 75.95,75.69 76.2,75.44 80.14,75.44 81.03,76.33 v81.03,76.96
ADR17  (via drill 0.38)
  Top 0.178: U9.3 77.6,73.15 77.85,73.41 R52.1 77.85,75.06 78.49,75.69 81.53,75.69 81.92,76.07 v81.92,78.23
  Bottom 0.178: JP71.1 79.35,76.56 79.76,76.96 79.76,77.6 80.39,78.23 v81.92,78.23
GND  (via drill 0.38)
  other vias: 16.51,22.61 13.97,24.38 23.7,20.45 23.7,16.26 28.52,17.53
  pour Bottom (isolate 0.305): 7.62,8.64 7.62,34.04 33.02,34.04 33.02,8.64
  pour Top (isolate 0.305): 7.62,8.64 7.62,34.04 33.02,34.04 33.02,8.64
GND1  (via drill 0.38)
  other vias: 42.42,22.61 39.88,24.38 49.61,20.45 49.61,16.26 54.43,17.53
  pour Bottom (isolate 0.305): 33.53,8.64 33.53,34.04 58.93,34.04 58.93,8.64
  pour Top (isolate 0.305): 33.53,8.64 33.53,34.04 58.93,34.04 58.93,8.64
GND2  (via drill 0.38)
  other vias: 68.33,22.61 65.79,24.38 75.51,20.45 75.51,16.26 80.34,17.53
  pour Bottom (isolate 0.305): 59.44,8.64 59.44,34.04 84.84,34.04 84.84,8.64
  pour Top (isolate 0.305): 59.44,8.64 59.44,34.04 84.84,34.04 84.84,8.64
GND3  (via drill 0.38)
  other vias: 16.51,48.51 13.97,50.29 23.7,46.36 23.7,42.16 28.52,43.43
  pour Bottom (isolate 0.305): 7.62,34.54 7.62,59.94 33.02,59.94 33.02,34.54
  pour Top (isolate 0.305): 7.62,34.54 7.62,59.94 33.02,59.94 33.02,34.54
GND4  (via drill 0.38)
  other vias: 42.42,48.51 39.88,50.29 49.61,46.36 49.61,42.16 54.43,43.43
  pour Bottom (isolate 0.305): 33.53,34.54 33.53,59.94 58.93,59.94 58.93,34.54
  pour Top (isolate 0.305): 33.53,34.54 33.53,59.94 58.93,59.94 58.93,34.54
GND5  (via drill 0.38)
  other vias: 68.33,48.51 65.79,50.29 75.51,46.36 75.51,42.16 80.34,43.43
  pour Bottom (isolate 0.305): 59.44,34.54 59.44,59.94 84.84,59.94 84.84,34.54
  pour Top (isolate 0.305): 59.44,34.54 59.44,59.94 84.84,59.94 84.84,34.54
GND6  (via drill 0.38)
  other vias: 16.51,74.42 13.97,76.2 23.7,72.26 23.7,68.07 28.52,69.34
  pour Bottom (isolate 0.305): 7.62,60.45 7.62,85.85 33.02,85.85 33.02,60.45
  pour Top (isolate 0.305): 7.62,60.45 7.62,85.85 33.02,85.85 33.02,60.45
GND7  (via drill 0.38)
  other vias: 42.42,74.42 39.88,76.2 49.61,72.26 49.61,68.07 54.43,69.34
  pour Bottom (isolate 0.305): 33.53,60.45 33.53,85.85 58.93,85.85 58.93,60.45
  pour Top (isolate 0.305): 33.53,60.45 33.53,85.85 58.93,85.85 58.93,60.45
GND8  (via drill 0.38)
  other vias: 68.33,74.42 65.79,76.2 75.51,72.26 75.51,68.07 80.34,69.34
  pour Bottom (isolate 0.305): 59.44,60.45 59.44,85.85 84.84,85.85 84.84,60.45
  pour Top (isolate 0.305): 59.44,60.45 59.44,85.85 84.84,85.85 84.84,60.45
N$1
  Top 0.178: JP7.1 18.54,25.15 17.69,26 R5.2
N$2
  Top 0.178: JP7.3 22.1,25.15 22.95,26 R4.2
N$3  (via drill 0.38)
  Top 0.178: R2.1 v25.4,14.22
  Bottom 0.178: JP8.1 v25.4,14.22
N$4
  Top 0.178: R6.1 C4.1 22.01,18.38 21.46,18.92 21.46,20.57 21.84,20.95 21.84,22.35 22.13,22.64 U2.1
N$5
  Top 0.178: JP13.1 44.45,25.15 43.6,26 R8.2
N$6
  Top 0.178: JP13.3 48.01,25.15 48.86,26 R7.2
N$7  (via drill 0.38)
  Top 0.178: R11.1 v51.31,14.22
  Bottom 0.178: JP16.1 v51.31,14.22
N$8
  Top 0.178: R12.1 C2.1 47.92,18.38 47.37,18.92 47.37,20.57 47.75,20.95 47.75,22.35 48.04,22.64 U1.1
N$9
  Top 0.178: JP21.1 70.36,25.15 69.51,26 R14.2
N$10
  Top 0.178: JP21.3 73.91,25.15 74.76,26 R13.2
N$11  (via drill 0.38)
  Top 0.178: R17.1 v77.22,14.22
  Bottom 0.178: JP24.1 v77.22,14.22
N$12
  Top 0.178: R18.1 C5.1 73.83,18.38 73.28,18.92 73.28,20.57 73.66,20.95 73.66,22.35 73.94,22.64 U3.1
N$13
  Top 0.178: JP29.1 18.54,51.05 17.69,51.9 R20.2
N$14
  Top 0.178: JP29.3 22.1,51.05 22.95,51.9 R19.2
N$15  (via drill 0.38)
  Top 0.178: R23.1 v25.4,40.13
  Bottom 0.178: JP32.1 v25.4,40.13
N$16
  Top 0.178: R24.1 C7.1 22.01,44.28 21.46,44.83 21.46,46.48 21.84,46.86 21.84,48.26 22.13,48.54 U4.1
N$17
  Top 0.178: JP37.1 44.45,51.05 43.6,51.9 R26.2
N$18
  Top 0.178: JP37.3 48.01,51.05 48.86,51.9 R25.2
N$19  (via drill 0.38)
  Top 0.178: R29.1 v51.31,40.13
  Bottom 0.178: JP40.1 v51.31,40.13
N$20
  Top 0.178: R30.1 C9.1 47.92,44.28 47.37,44.83 47.37,46.48 47.75,46.86 47.75,48.26 48.04,48.54 U5.1
N$21
  Top 0.178: JP45.1 70.36,51.05 69.51,51.9 R32.2
N$22
  Top 0.178: JP45.3 73.91,51.05 74.76,51.9 R31.2
N$23  (via drill 0.38)
  Top 0.178: R35.1 v77.22,40.13
  Bottom 0.178: JP48.1 v77.22,40.13
N$24
  Top 0.178: R36.1 C11.1 73.83,44.28 73.28,44.83 73.28,46.48 73.66,46.86 73.66,48.26 73.94,48.54 U6.1
N$25
  Top 0.178: JP53.1 18.54,76.96 17.69,77.81 R38.2
N$26
  Top 0.178: JP53.3 22.1,76.96 22.95,77.81 R37.2
N$27  (via drill 0.38)
  Top 0.178: R41.1 v25.4,66.04
  Bottom 0.178: JP56.1 v25.4,66.04
N$28
  Top 0.178: R42.1 C13.1 22.01,70.19 21.46,70.74 21.46,72.39 21.84,72.77 21.84,74.17 22.13,74.45 U7.1
N$29
  Top 0.178: JP61.1 44.45,76.96 43.6,77.81 R44.2
N$30
  Top 0.178: JP61.3 48.01,76.96 48.86,77.81 R43.2
N$31  (via drill 0.38)
  Top 0.178: R47.1 v51.31,66.04
  Bottom 0.178: JP64.1 v51.31,66.04
N$32
  Top 0.178: R48.1 C15.1 47.92,70.19 47.37,70.74 47.37,72.39 47.75,72.77 47.75,74.17 48.04,74.45 U8.1
N$33
  Top 0.178: JP69.1 70.36,76.96 69.51,77.81 R50.2
N$34
  Top 0.178: JP69.3 73.91,76.96 74.76,77.81 R49.2
N$35  (via drill 0.38)
  Top 0.178: R53.1 v77.22,66.04
  Bottom 0.178: JP72.1 v77.22,66.04
N$36
  Top 0.178: R54.1 C17.1 73.83,70.19 73.28,70.74 73.28,72.39 73.66,72.77 73.66,74.17 73.94,74.45 U9.1
SCL  (via drill 0.38)
  Top 0.178: J2.4 13.69,19.84 14.22,19.3 15.11,19.3 16.5,20.69 U2.7 18.56,20.69 18.8,20.45 18.8,19.3 18.54,19.05 16.51,19.05 16,18.54 16,16 17.02,14.99 v22.86,14.99 J3.4 | J4.4 29.49,22.84 29.72,22.61 v31.12,22.61 | R4.1 24.13,23.49 v23.75,23.11
  Bottom 0.178: J3.4 22.86,10.54 23.5,11.18 30.48,11.18 31.12,11.81 v31.12,22.61 | v22.86,14.99 22.86,22.23 v23.75,23.11
SCL1  (via drill 0.38)
  Top 0.178: J1.4 39.6,19.84 40.13,19.3 41.02,19.3 42.4,20.69 U1.7 44.46,20.69 44.7,20.45 44.7,19.3 44.45,19.05 42.42,19.05 41.91,18.54 41.91,16 42.93,14.99 v48.77,14.99 J6.4 | J7.4 55.4,22.84 55.63,22.61 v57.02,22.61 | R7.1 50.04,23.49 v49.66,23.11
  Bottom 0.178: J6.4 48.77,10.54 49.4,11.18 56.39,11.18 57.02,11.81 v57.02,22.61 | v48.77,14.99 48.77,22.23 v49.66,23.11
SCL2  (via drill 0.38)
  Top 0.178: J9.4 65.51,19.84 66.04,19.3 66.93,19.3 68.31,20.69 U3.7 70.37,20.69 70.61,20.45 70.61,19.3 70.36,19.05 68.33,19.05 67.82,18.54 67.82,16 68.83,14.99 v74.68,14.99 J10.4 | J11.4 81.3,22.84 81.53,22.61 v82.93,22.61 | R13.1 75.95,23.49 v75.56,23.11
  Bottom 0.178: J10.4 74.68,10.54 75.31,11.18 82.3,11.18 82.93,11.81 v82.93,22.61 | v74.68,14.99 74.68,22.23 v75.56,23.11
SCL3  (via drill 0.38)
  Top 0.178: J13.4 13.69,45.74 14.22,45.21 15.11,45.21 16.5,46.59 U4.7 18.56,46.59 18.8,46.36 18.8,45.21 18.54,44.96 16.51,44.96 16,44.45 16,41.91 17.02,40.89 v22.86,40.89 J14.4 | J15.4 29.49,48.74 29.72,48.51 v31.12,48.51 | R19.1 24.13,49.4 v23.75,49.02
  Bottom 0.178: J14.4 22.86,36.45 23.5,37.08 30.48,37.08 31.12,37.72 v31.12,48.51 | v22.86,40.89 22.86,48.13 v23.75,49.02
SCL4  (via drill 0.38)
  Top 0.178: J17.4 39.6,45.74 40.13,45.21 41.02,45.21 42.4,46.59 U5.7 44.46,46.59 44.7,46.36 44.7,45.21 44.45,44.96 42.42,44.96 41.91,44.45 41.91,41.91 42.93,40.89 v48.77,40.89 J18.4 | J19.4 55.4,48.74 55.63,48.51 v57.02,48.51 | R25.1 50.04,49.4 v49.66,49.02
  Bottom 0.178: J18.4 48.77,36.45 49.4,37.08 56.39,37.08 57.02,37.72 v57.02,48.51 | v48.77,40.89 48.77,48.13 v49.66,49.02
SCL5  (via drill 0.38)
  Top 0.178: J21.4 65.51,45.74 66.04,45.21 66.93,45.21 68.31,46.59 U6.7 70.37,46.59 70.61,46.36 70.61,45.21 70.36,44.96 68.33,44.96 67.82,44.45 67.82,41.91 68.83,40.89 v74.68,40.89 J22.4 | J23.4 81.3,48.74 81.53,48.51 v82.93,48.51 | R31.1 75.95,49.4 v75.56,49.02
  Bottom 0.178: J22.4 74.68,36.45 75.31,37.08 82.3,37.08 82.93,37.72 v82.93,48.51 | v74.68,40.89 74.68,48.13 v75.56,49.02
SCL6  (via drill 0.38)
  Top 0.178: J25.4 13.69,71.65 14.22,71.12 15.11,71.12 16.5,72.5 U7.7 18.56,72.5 18.8,72.26 18.8,71.12 18.54,70.87 16.51,70.87 16,70.36 16,67.82 17.02,66.8 v22.86,66.8 J26.4 | J27.4 29.49,74.65 29.72,74.42 v31.12,74.42 | R37.1 24.13,75.31 v23.75,74.93
  Bottom 0.178: J26.4 22.86,62.36 23.5,62.99 30.48,62.99 31.12,63.63 v31.12,74.42 | v22.86,66.8 22.86,74.04 v23.75,74.93
SCL7  (via drill 0.38)
  Top 0.178: J29.4 39.6,71.65 40.13,71.12 41.02,71.12 42.4,72.5 U8.7 44.46,72.5 44.7,72.26 44.7,71.12 44.45,70.87 42.42,70.87 41.91,70.36 41.91,67.82 42.93,66.8 v48.77,66.8 J30.4 | J31.4 55.4,74.65 55.63,74.42 v57.02,74.42 | R43.1 50.04,75.31 v49.66,74.93
  Bottom 0.178: J30.4 48.77,62.36 49.4,62.99 56.39,62.99 57.02,63.63 v57.02,74.42 | v48.77,66.8 48.77,74.04 v49.66,74.93
SCL8  (via drill 0.38)
  Top 0.178: J33.4 65.51,71.65 66.04,71.12 66.93,71.12 68.31,72.5 U9.7 70.37,72.5 70.61,72.26 70.61,71.12 70.36,70.87 68.33,70.87 67.82,70.36 67.82,67.82 68.83,66.8 v74.68,66.8 J34.4 | J35.4 81.3,74.65 81.53,74.42 v82.93,74.42 | R49.1 75.95,75.31 v75.56,74.93
  Bottom 0.178: J34.4 74.68,62.36 75.31,62.99 82.3,62.99 82.93,63.63 v82.93,74.42 | v74.68,66.8 74.68,74.04 v75.56,74.93
SDA  (via drill 0.38)
  Top 0.178: 11.43,20.83 11.43,19.18 11.81,18.8 15.24,18.8 | 11.43,20.83 11.43,24.51 12.19,25.27 14.99,25.27 15.96,24.3 R5.1 | 15.24,18.8 16.48,20.04 U2.6 | J2.3 11.44,20.84 11.43,20.83 | J4.3 29.35,21.84 v29.85,21.34 | J3.3 20.32,12.45 19.05,13.72 16.51,13.72 15.24,14.99 15.24,18.8
  Bottom 0.178: J3.3 20.32,11.18 20.96,11.81 29.34,11.81 29.85,12.32 v29.85,21.34
SDA1  (via drill 0.38)
  Top 0.178: 37.34,20.83 37.34,19.18 37.72,18.8 41.15,18.8 | 37.34,20.83 37.34,24.51 38.1,25.27 40.89,25.27 41.87,24.3 R8.1 | 41.15,18.8 42.39,20.04 U1.6 | J1.3 37.35,20.84 37.34,20.83 | J7.3 55.25,21.84 v55.75,21.34 | J6.3 46.23,12.45 44.96,13.72 42.42,13.72 41.15,14.99 41.15,18.8
  Bottom 0.178: J6.3 46.23,11.18 46.86,11.81 55.24,11.81 55.75,12.32 v55.75,21.34
SDA2  (via drill 0.38)
  Top 0.178: 63.25,20.83 63.25,19.18 63.63,18.8 67.06,18.8 | 63.25,20.83 63.25,24.51 64.01,25.27 66.8,25.27 67.78,24.3 R14.1 | 67.06,18.8 68.3,20.04 U3.6 | J9.3 63.25,20.84 63.25,20.83 | J11.3 81.16,21.84 v81.66,21.34 | J10.3 72.14,12.45 70.87,13.72 68.33,13.72 67.06,14.99 67.06,18.8
  Bottom 0.178: J10.3 72.14,11.18 72.77,11.81 81.15,11.81 81.66,12.32 v81.66,21.34
SDA3  (via drill 0.38)
  Top 0.178: 11.43,46.74 11.43,45.08 11.81,44.7 15.24,44.7 | 11.43,46.74 11.43,50.42 12.19,51.18 14.99,51.18 15.96,50.2 R20.1 | 15.24,44.7 16.48,45.94 U4.6 | J13.3 11.44,46.74 11.43,46.74 | J15.3 29.35,47.74 v29.85,47.24 | J14.3 20.32,38.35 19.05,39.62 16.51,39.62 15.24,40.89 15.24,44.7
  Bottom 0.178: J14.3 20.32,37.08 20.96,37.72 29.34,37.72 29.85,38.23 v29.85,47.24
SDA4  (via drill 0.38)
  Top 0.178: 37.34,46.74 37.34,45.08 37.72,44.7 41.15,44.7 | 37.34,46.74 37.34,50.42 38.1,51.18 40.89,51.18 41.87,50.2 R26.1 | 41.15,44.7 42.39,45.94 U5.6 | J17.3 37.35,46.74 37.34,46.74 | J19.3 55.25,47.74 v55.75,47.24 | J18.3 46.23,38.35 44.96,39.62 42.42,39.62 41.15,40.89 41.15,44.7
  Bottom 0.178: J18.3 46.23,37.08 46.86,37.72 55.24,37.72 55.75,38.23 v55.75,47.24
SDA5  (via drill 0.38)
  Top 0.178: 63.25,46.74 63.25,45.08 63.63,44.7 67.06,44.7 | 63.25,46.74 63.25,50.42 64.01,51.18 66.8,51.18 67.78,50.2 R32.1 | 67.06,44.7 68.3,45.94 U6.6 | J21.3 63.25,46.74 | J23.3 81.16,47.74 v81.66,47.24 | J22.3 72.14,38.35 70.87,39.62 68.33,39.62 67.06,40.89 67.06,44.7
  Bottom 0.178: J22.3 72.14,37.08 72.77,37.72 81.15,37.72 81.66,38.23 v81.66,47.24
SDA6  (via drill 0.38)
  Top 0.178: 11.43,72.64 11.43,70.99 11.81,70.61 15.24,70.61 | 11.43,72.64 11.43,76.33 12.19,77.09 14.99,77.09 15.96,76.11 R38.1 | 15.24,70.61 16.48,71.85 U7.6 | J25.3 11.44,72.65 11.43,72.64 | J27.3 29.35,73.65 v29.85,73.15 | J26.3 20.32,64.26 19.05,65.53 16.51,65.53 15.24,66.8 15.24,70.61
  Bottom 0.178: J26.3 20.32,62.99 20.96,63.63 29.34,63.63 29.85,64.14 v29.85,73.15
SDA7  (via drill 0.38)
  Top 0.178: 37.34,72.64 37.34,70.99 37.72,70.61 41.15,70.61 | 37.34,72.64 37.34,76.33 38.1,77.09 40.89,77.09 41.87,76.11 R44.1 | 41.15,70.61 42.39,71.85 U8.6 | J29.3 37.35,72.65 37.34,72.64 | J31.3 55.25,73.65 v55.75,73.15 | J30.3 46.23,64.26 44.96,65.53 42.42,65.53 41.15,66.8 41.15,70.61
  Bottom 0.178: J30.3 46.23,62.99 46.86,63.63 55.24,63.63 55.75,64.14 v55.75,73.15
SDA8  (via drill 0.38)
  Top 0.178: 63.25,72.64 63.25,70.99 63.63,70.61 67.06,70.61 | 63.25,72.64 63.25,76.33 64.01,77.09 66.8,77.09 67.78,76.11 R50.1 | 67.06,70.61 68.3,71.85 U9.6 | J33.3 63.25,72.65 63.25,72.64 | J35.3 81.16,73.65 v81.66,73.15 | J34.3 72.14,64.26 70.87,65.53 68.33,65.53 67.06,66.8 67.06,70.61
  Bottom 0.178: J34.3 72.14,62.99 72.77,63.63 81.15,63.63 81.66,64.14 v81.66,73.15

## Text on the board
Bottom: X01 | X01 | X01 | X01 | X01 | X01 | X01 | X01 | X01
Dimension: vscore | PCB must be 0.8mm thick | vscore | vscore | vscore
tPlace: AK9750 / Presence Sensor | AK9750 / Presence Sensor | AK9750 / Presence Sensor | GND | 3.3V | SDA | SCL | !INT | GND | 3.3V | SDA | SCL | !INT | GND | 3.3V | SDA | SCL | !INT | AK9750 / Presence Sensor | AK9750 / Presence Sensor | AK9750 / Presence Sensor | GND | 3.3V | SDA | SCL | !INT | GND | 3.3V | SDA | SCL | !INT | GND | 3.3V | SDA | SCL | !INT | AK9750 / Presence Sensor | AK9750 / Presence Sensor | AK9750 / Presence Sensor | GND | 3.3V | SDA | SCL | !INT | GND | 3.3V | SDA | SCL | !INT | GND | 3.3V | SDA | SCL | !INT
bPlace: AK9750 / Presence Sensor | AK9750 / Presence Sensor | AK9750 / Presence Sensor | OB Area | OB Area | OB Area | 0 | 1 | 0 | 1 | 0 | 1 | ADR | ADR | ADR | 3 | 3 | 3 | 2 | 2 | 2 | 4 | 4 | 4 | 1 | 1 | 1 | INT | INT | INT | GND | 3.3V | SDA | SCL | !INT | GND | 3.3V | SDA | SCL | !INT | GND | 3.3V | SDA | SCL | !INT | AK9750 / Presence Sensor | AK9750 / Presence Sensor | AK9750 / Presence Sensor | OB Area | OB Area | OB Area | 0 | 1 | 0 | 1 | 0 | 1 | 3 | ADR | 3 | ADR | 3 | ADR | 2 | 2 | 2 | 4 | 4 | 4 | 1 | 1 | 1 | INT | INT | INT | GND | 3.3V | SDA | SCL | !INT | GND | 3.3V | SDA | SCL | !INT | GND | 3.3V | SDA | SCL | !INT | AK9750 / Presence Sensor | AK9750 / Presence Sensor | AK9750 / Presence Sensor | OB Area | 0 | 1 | OB Area | 0 | 1 | OB Area | 0 | 1 | 3 | ADR | 3 | ADR | 3 | ADR | 4 | 2 | 4 | 2 | 4 | 2 | 1 | 1 | 1 | INT | INT | INT | GND | 3.3V | SDA | SCL | !INT | GND | 3.3V | SDA | SCL | !INT | GND | 3.3V | SDA | SCL | !INT